# Altium PCB PCB_puente.PcbDoc
Units mm, origin at the board's own origin, x right, y up, seen from the top; angles counter-clockwise.
Board outline 50.02 x 50.02 mm, 2 copper layers (Top Layer, Bottom Layer); 6 components, 4 nets, 13 pads, 0 vias.
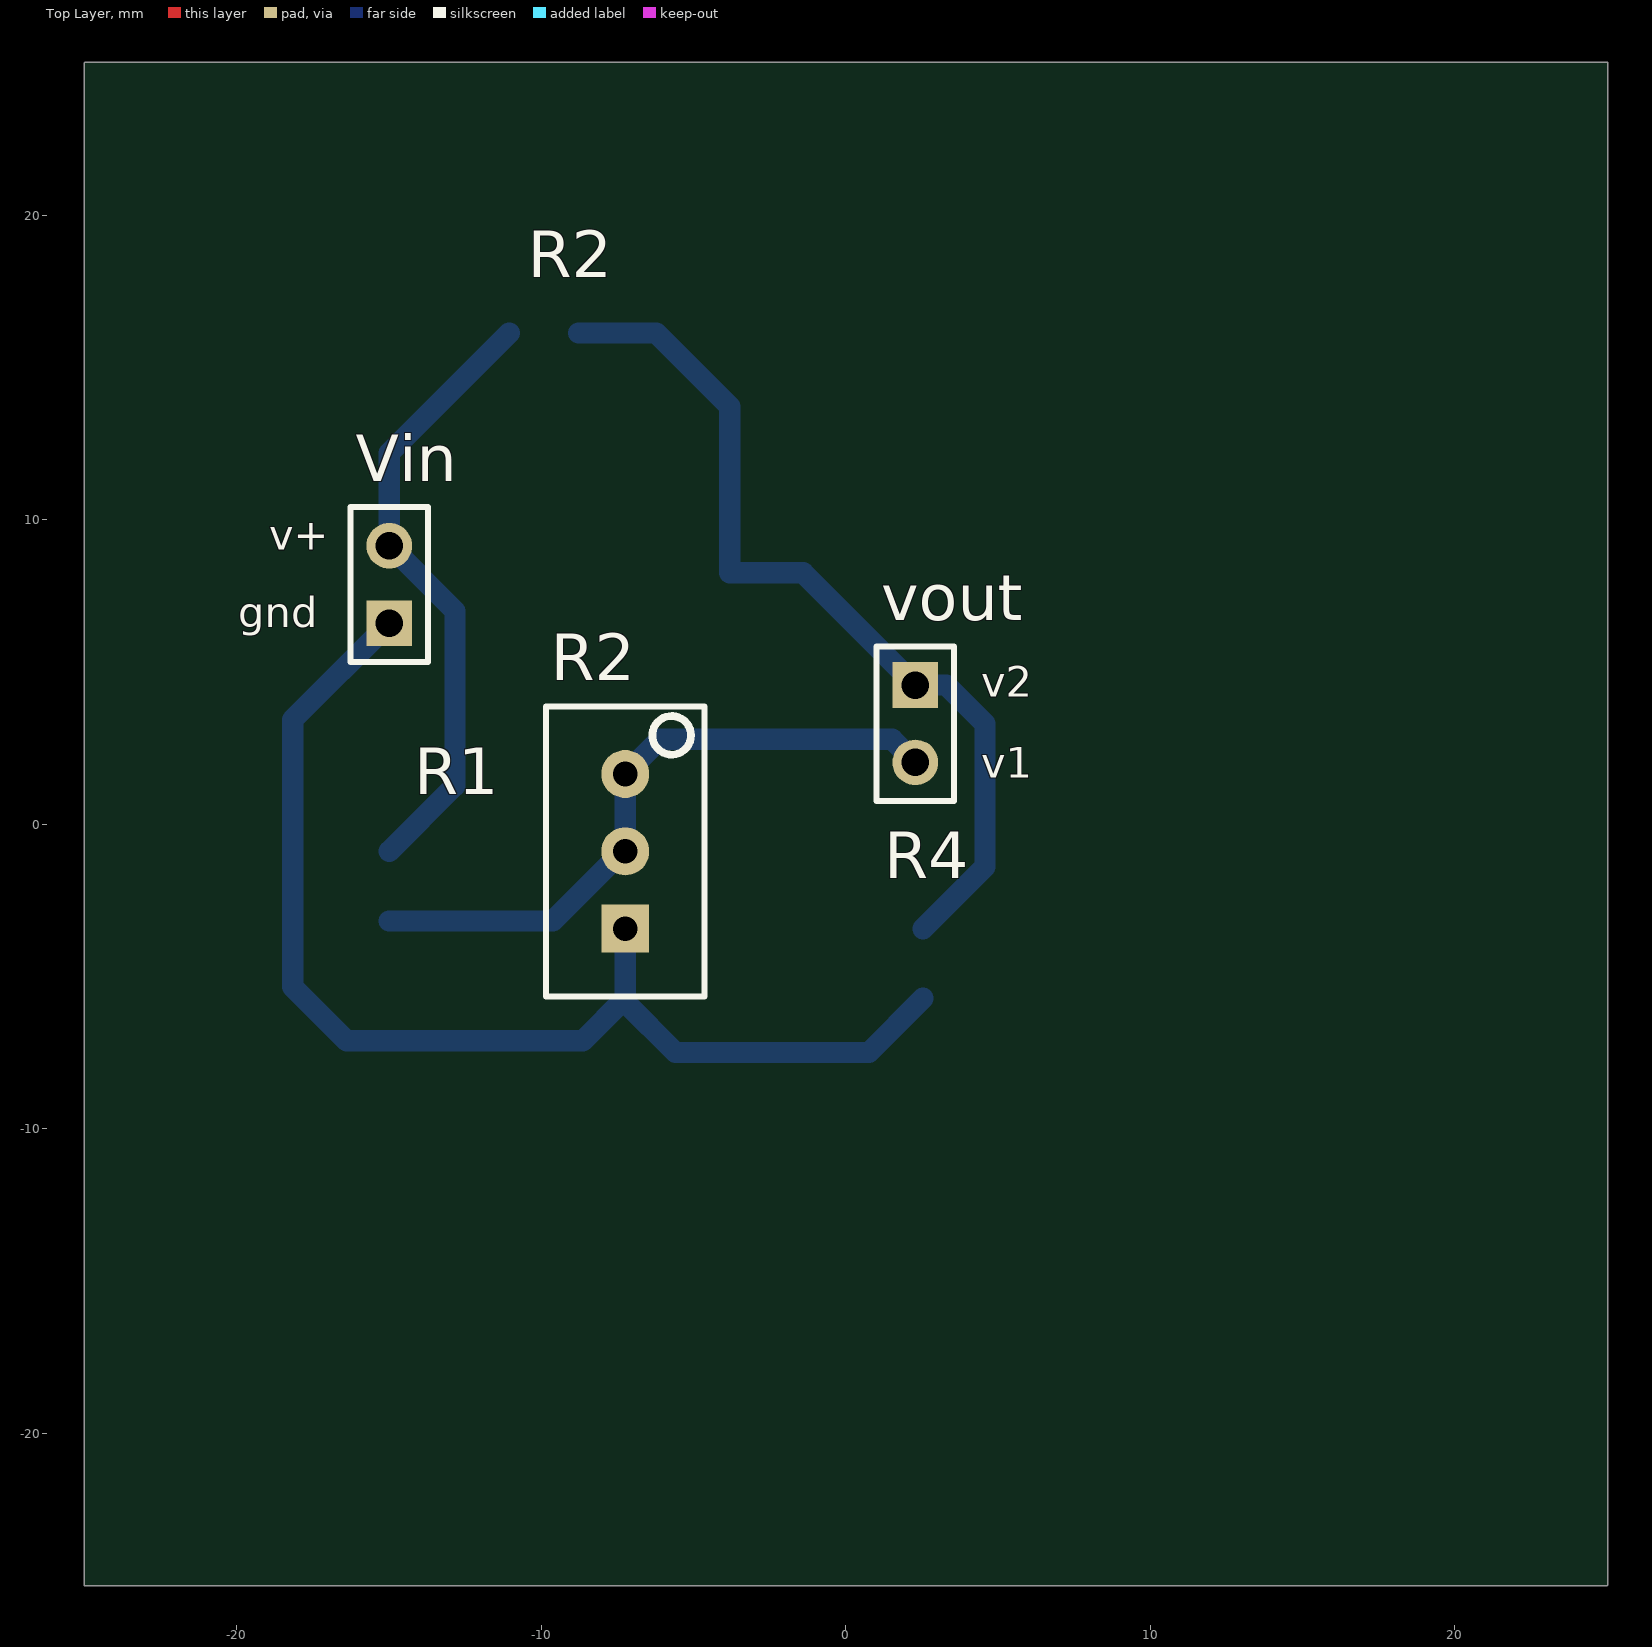
[diagram p0: Top Layer view]
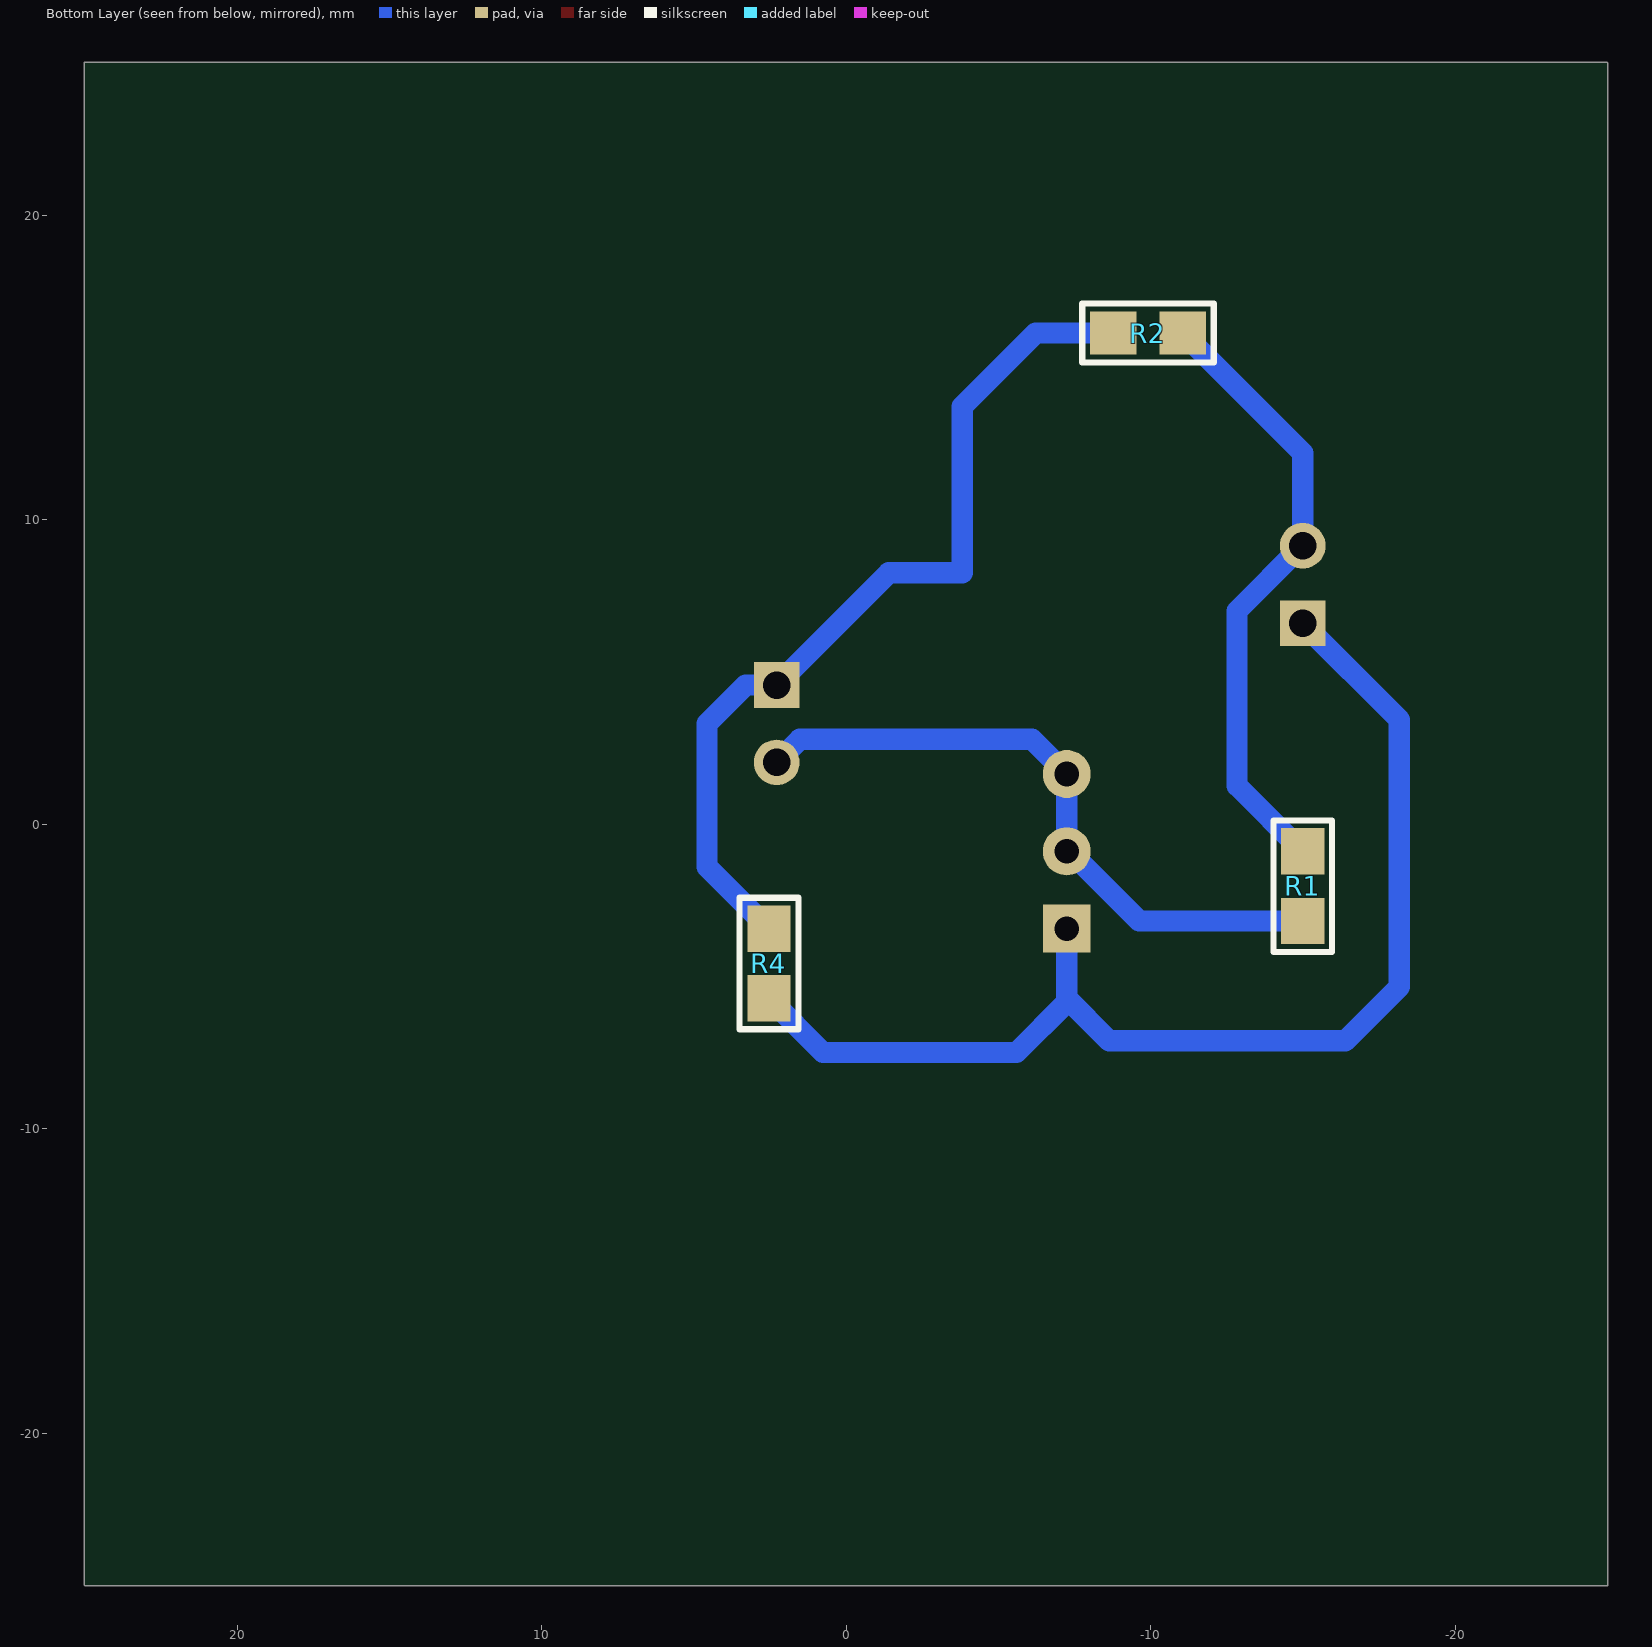
[diagram p1: Bottom Layer view, seen from below]
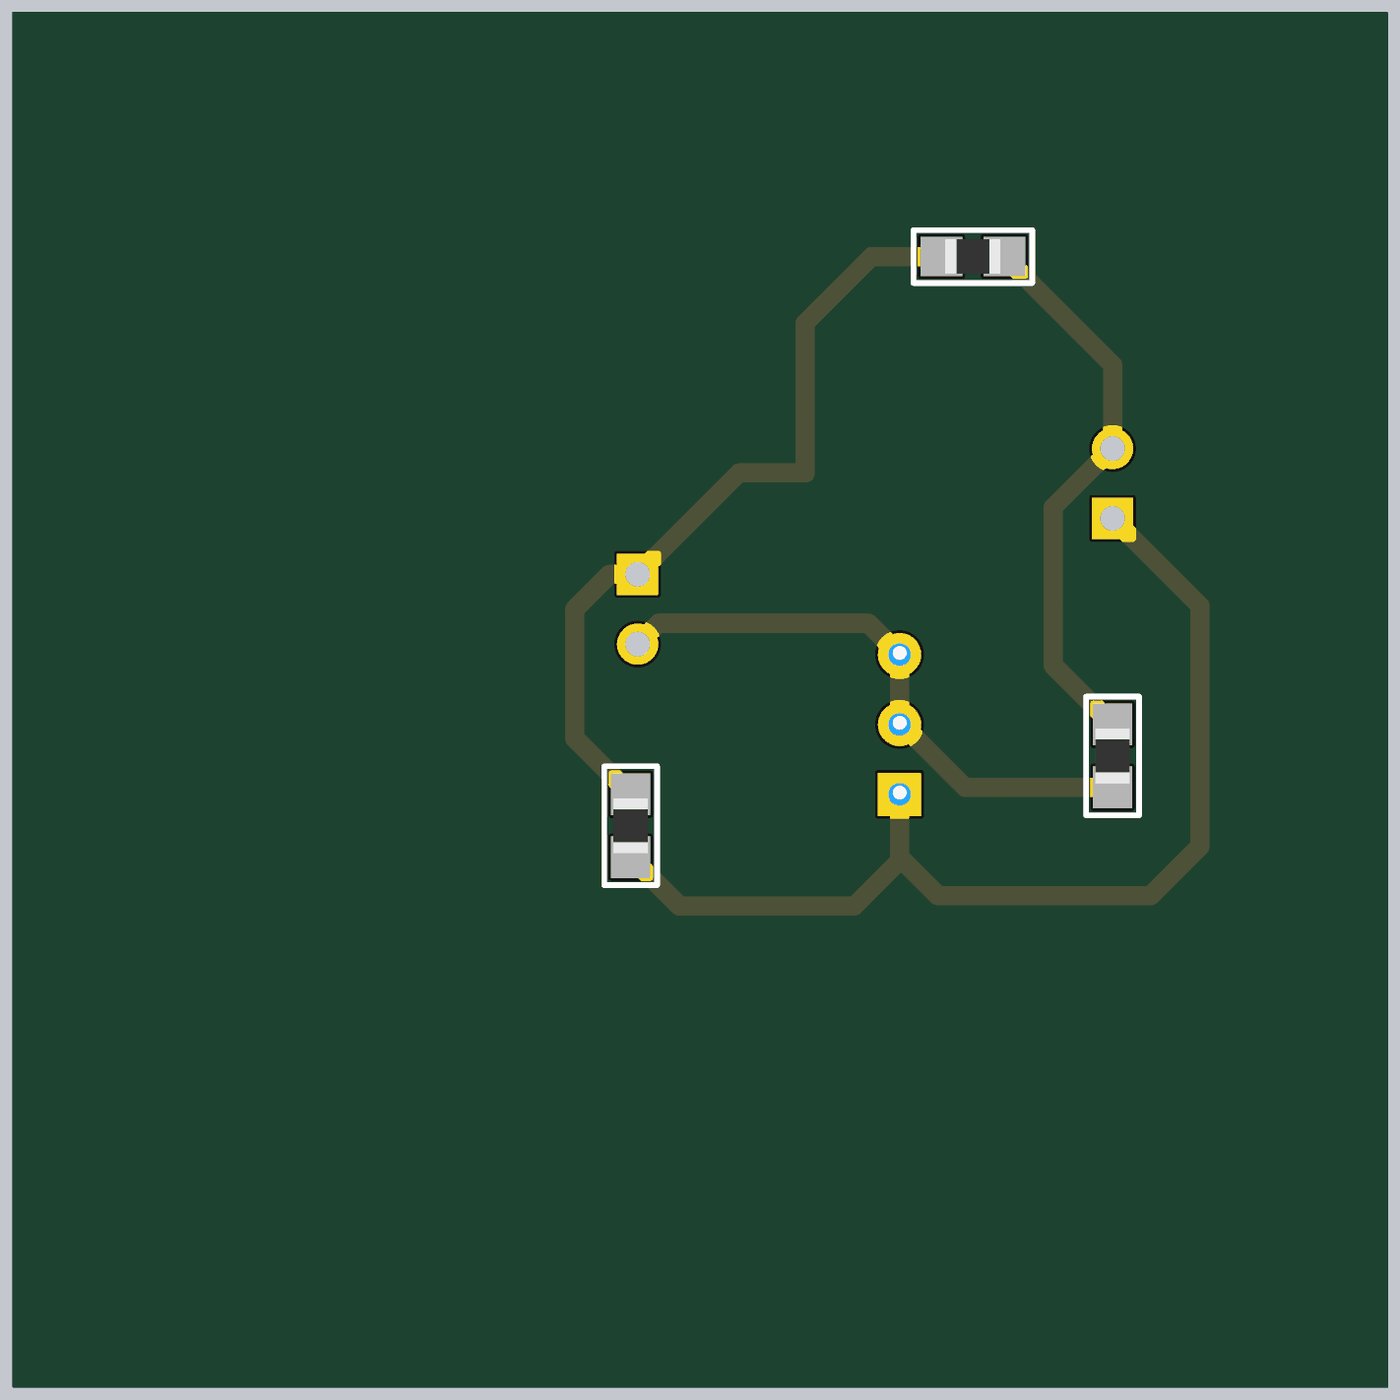
[diagram p2: 3D render of the assembled board from below, using the file's embedded part models]

## Layer stack, top to bottom
Top Solder: solder mask 0.0102, Solder Resist, Dk 3.5
Top Layer: signal copper 0.0356
Dielectric 1: dielectric 0.32, FR-4, Dk 4.8
Bottom Layer: signal copper 0.0356
Bottom Solder: solder mask 0.0102, Solder Resist, Dk 3.5

## Board outline
25,-25 25.019,-24.981 25.019,25.019 -24.981,25.019 -25,25 -25,-25

## Design rules (kind name [scope] priority, off if disabled: settings)
Clearance [All] p1: gap=0.4 ignorepadtopadclearanceinfootprint=FALSE
PolygonConnect [All] p1: connectstyle=Relief reliefconductorwidth=0.254 reliefentries=4 polygonreliefangle="90 Angle" airgapwidth=0.254
RoutingVias [All] p1: holewidth=0.4 width=2 viastyle="Through Hole" minholewidth=0.3 minwidth=1.5 maxholewidth=0.5 maxwidth=2
SolderMaskExpansion [All] p1: expansion=0.102
Width [All] p1: maxlimit=0.9 minlimit=0.7 preferedwidth=0.8
30 further rules are at their usual default settings.

## Classes and differential pairs
component class Schematic_puente: R1 R2 R4 Vin vout

## Components (designator, comment, footprint, x,y, rotation, side; value= is the part's Value field where it differs from the comment)
R1 "RES" 0805 -14.986,-2.032 r90 bottom
R2 "PRESET" "PRESET V" -7.239,-0.889 r90 top
R2 "RES" 0805 -9.906,16.129 r180 bottom
R4 "RES" 0805 2.54,-4.572 r90 bottom
Vin "Header 2" HDR1X2 -14.986,6.604 r90 top
vout "Header 2" HDR1X2 2.286,4.572 r270 top

## Footprints (in the part's own frame and the unit in brackets; to place one, negate y for a bottom-side part, rotate by r counter-clockwise, add the part's x,y. Pads: shape width x height; smd on the part's side, far side on the other; paste and mask are expansions set on the pad)
0805 [mil] "Pasivo 0805"
  rect 60x56 smd: 1(-45,0) 2(45,0)
  silkscreen extent -85,-38 85,38, body extent -39,-25 39,25, height 15
HDR1X2 [mm] "Connector; Header; 2 Position"
  rect 1.5x1.5 hole 0.9: 1(0,0)
  round 1.5 hole 0.9: 2(2.54,0)
  silkscreen extent -1.27,-1.27 3.81,1.27
"PRESET V" [mil]
  rect 62x62 hole 32: 1(-100,0)
  round 62 hole 32: 2(0,0) 3(100,0)
  silkscreen extent -188,-102 188,102, body extent -185,-95 190,95, height 455

## Part data
Vin vout: "Header, 2-Pin", LatestRevisionDate=17-Jul-2002, LatestRevisionNote="Re-released for DXP Platform.", Publisher="Altium Limited"

## Nets (pads, with @x,y where several pads share a name; then routed paths per layer and width w, separated by ;. In a path a pad name is that pad's centre, name@x,y a point inside that pad or via, vN(x,y) a via of type N, cw(c..) or ccw(c..) an arc to the next point about the centre after c; other vN are vias at no path point)
GND: R2.1@-7.239,-3.429 R4.1 Vin.1 | length 39.1
  Bottom Layer w0.7: Vin.1 -18.161,3.429 -18.161,-5.334 -16.383,-7.112 -8.636,-7.112 -7.239,-5.715 ; R2.1@-7.239,-3.429 -7.239,-5.715 ; R4.1 0.762,-7.493 -5.588,-7.493 -7.239,-5.842 -7.239,-5.715
NetR1_1: R1.1 R2.2@-7.239,-0.889 R2.3 vout.2 | length 21.5
  Bottom Layer w0.7: R1.1 -9.62,-3.175 -7.334,-0.889 -7.239,-0.889 R2.3 -6.096,2.794 1.524,2.794 vout.2
NetR1_2: R1.2 R2.2@-11.049,16.129 Vin.2 | length 20.4
  Bottom Layer w0.7: R1.2 -12.827,1.27 -12.827,7.006 -14.965,9.144 Vin.2 -14.986,12.192 R2.2@-11.049,16.129
NetR2_1: R2.1@-8.763,16.129 R4.2 vout.1 | length 29.4
  Bottom Layer w0.7: R2.1@-8.763,16.129 -6.223,16.129 -3.81,13.716 -3.81,8.255 -1.397,8.255 vout.1 3.302,4.572 4.572,3.302 4.572,-1.397 R4.2

## Silkscreen, mask and mechanical layers (free items; w line width, h text height)
Top Overlay:
  text "v+" at -18.923,9.017 h1
  text "gnd" at -19.939,6.477 h1
  text "v2" at 4.445,4.191 h1
  text "v1" at 4.445,1.524 h1